# EAGLE board Clock_Updated_3_Nets (EAGLE 7.2.0)
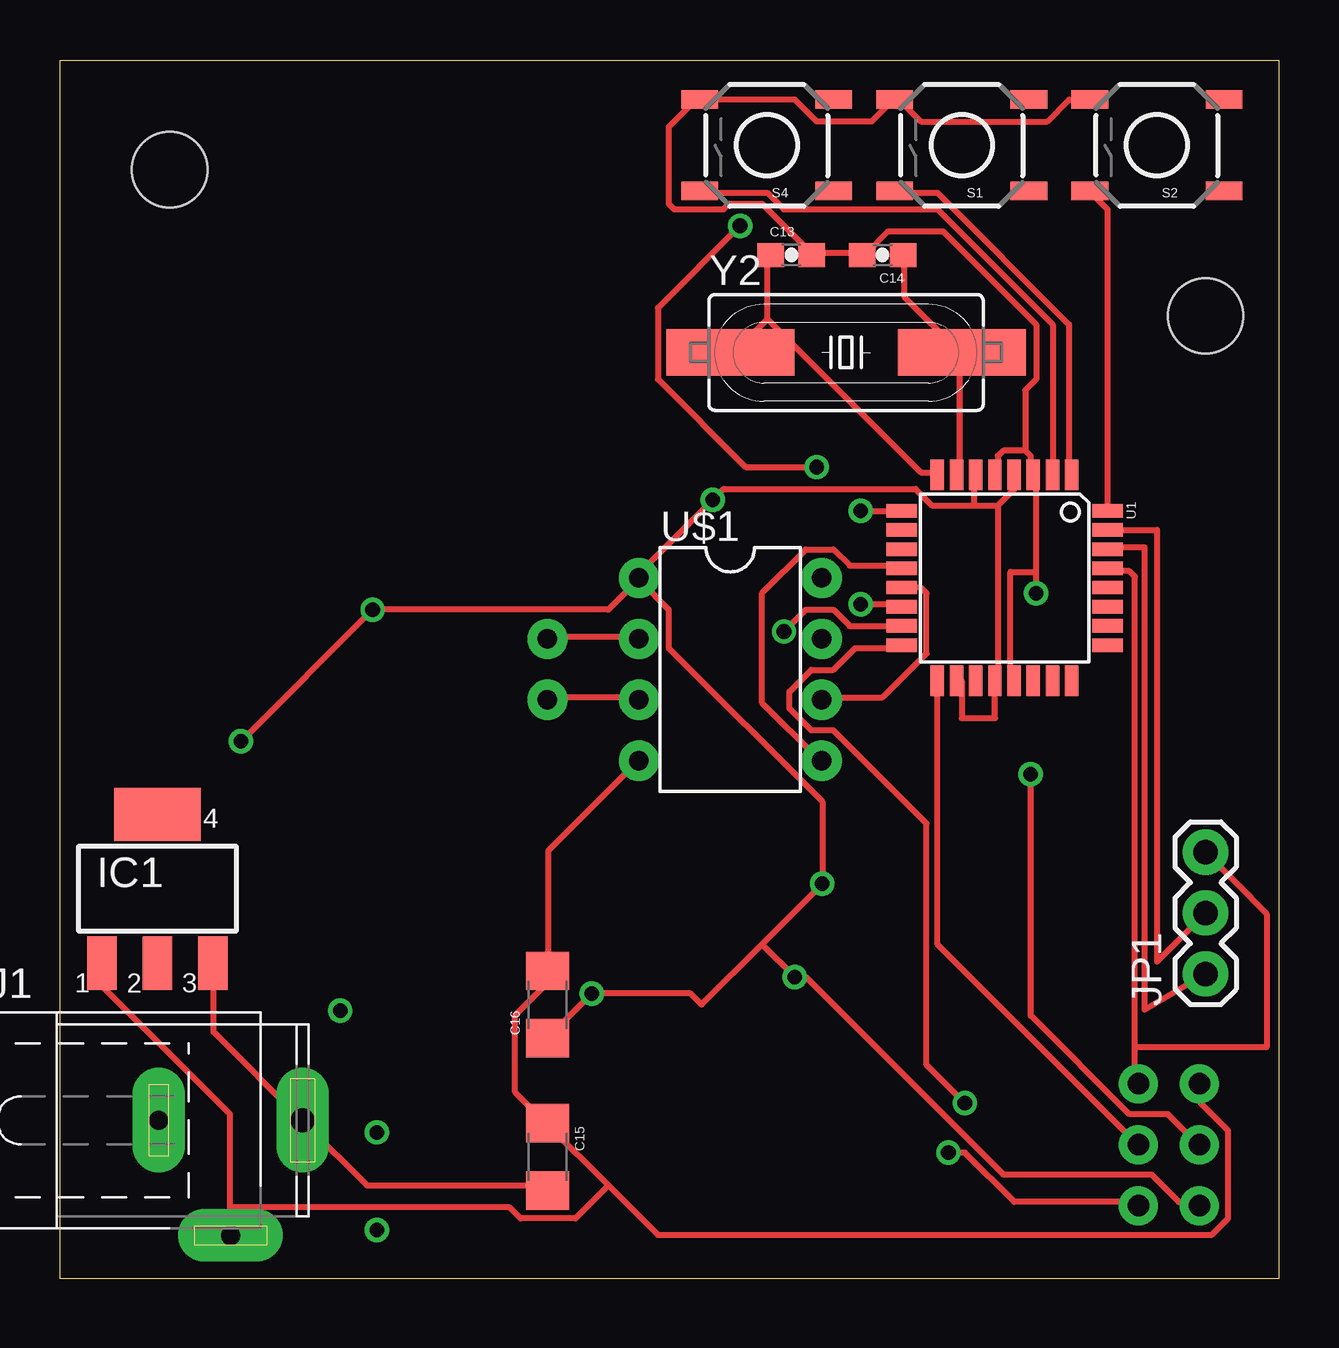
[diagram p0: board, top side]
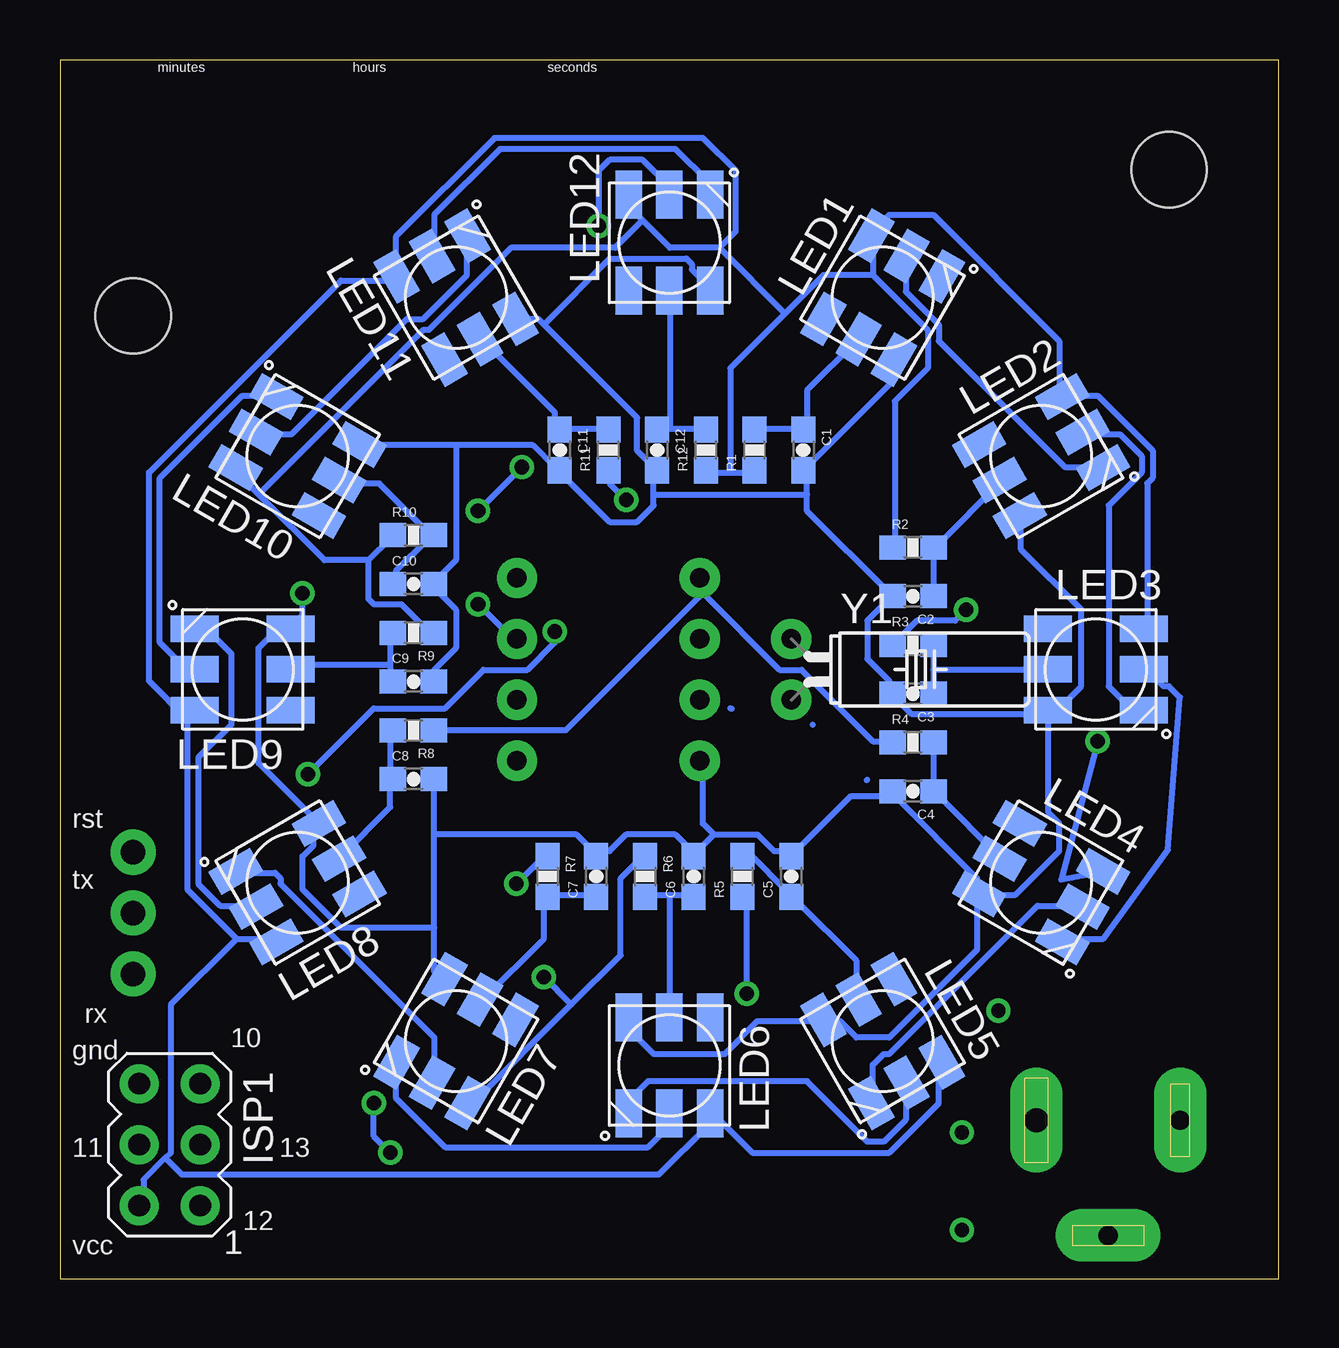
[diagram p1: board, bottom side, seen from below]

Size 50.8 x 50.8 mm. Coordinates in mm from the lower left corner, seen from the top.
Outline: 50.8,0 0,0 0,50.8 50.8,50.8 50.8,0
Copper layers (1*16): Top 0.035mm / dielectric 1.5mm / Bottom 0.035mm
Design rules "default": minimum track width 10mil, minimum drill 24mil, track to track 8mil, track to pad 8mil, pad to pad 8mil, via to via 8mil, smd to smd 8mil, copper to edge 40mil, drill to drill 8mil, minimum pad ring 10mil, minimum via ring 8mil, stop-mask expansion 4mil, vias tented up to drill 0mil, thermal gap 10mil
Holes 3.14 mm at 4.57,46.23 47.75,40.13

## Footprints (pad centres in the part's own frame; a part is rotated, then mirrored left to right if it is on the bottom)
0603-CAP = smd 1.1 x 1: 1 -0.85,0; 2 0.85,0
1206 = smd 1.6 x 1.8: 1 -1.4,0; 2 1.4,0
SOT223 = smd 1.219 x 2.235: 1 -2.311,-3.099; 2 0,-3.099; 3 2.311,-3.099 | smd 3.6 x 2.2: 4 0,3.099
AVRISP = drill 0.9 pad 1.626: 1 -1.27,2.54; 2 1.27,2.54; 3 -1.27,0; 4 1.27,0; 5 -1.27,-2.54; 6 1.27,-2.54
SPC4077 = drill 0.8 pad 2.184 long: 1 -3,0; 2 0,-4.8 | drill 1 pad 2.184 long: 3 3,0
1X03 = drill 1.016 pad 1.88: 1 0,0; 2 2.54,0; 3 5.08,0
WS2812 = smd 2 x 1.1: DI 2,0; DO 2,-1.7; LEDVDD -2,0; NC -2,1.7; VDD 2,1.7; VSS -2,-1.7
0603-RES = smd 1.1 x 1: 1 -0.85,0; 2 0.85,0
TACTILE-SWITCH-SMD = smd 1.524 x 0.762: 1 -2.794,1.905; 2 2.794,1.905; 3 -2.794,-1.905; 4 2.794,-1.905
TQFP32-08 = smd 1.27 x 0.559: 1 -4.293,2.8; 2 -4.293,2; 3 -4.293,1.2; 4 -4.293,0.4; 5 -4.293,-0.4; 6 -4.293,-1.2; 7 -4.293,-2; 8 -4.293,-2.8; 17 4.293,-2.8; 18 4.293,-2; 19 4.293,-1.2; 20 4.293,-0.4; 21 4.293,0.4; 22 4.293,1.2; 23 4.293,2; 24 4.293,2.8 | smd 0.559 x 1.27: 9 -2.8,-4.293; 10 -2,-4.293; 11 -1.2,-4.293; 12 -0.4,-4.293; 13 0.4,-4.293; 14 1.2,-4.293; 15 2,-4.293; 16 2.8,-4.293; 25 2.8,4.293; 26 2,4.293; 27 1.2,4.293; 28 0.4,4.293; 29 -0.4,4.293; 30 -1.2,4.293; 31 -2,4.293; 32 -2.8,4.293
DIL08-ROUND = drill 0.813 pad 1.676: 1 -3.81,-3.81; 2 -1.27,-3.81; 3 1.27,-3.81; 4 3.81,-3.81; 5 3.81,3.81; 6 1.27,3.81; 7 -1.27,3.81; 8 -3.81,3.81
TC38H = drill 0.813 pad 1.676: 1 -1.27,0; 2 1.27,0
HC49UP = smd 5.334 x 1.93: 1 -4.826,0; 2 4.826,0

## Placement (x,y rotation side)
C1  0.1uF  [0603-CAP]  19.81,34.54 270 bottom
C2  0.1uF  [0603-CAP]  15.24,28.45 180 bottom
C3  0.1uF  [0603-CAP]  15.24,24.38 180 bottom
C4  0.1uF  [0603-CAP]  15.24,20.32 180 bottom
C5  0.1uF  [0603-CAP]  20.32,16.76 90 bottom
C6  0.1uF  [0603-CAP]  24.38,16.76 90 bottom
C7  0.1uF  [0603-CAP]  28.45,16.76 90 bottom
C8  0.1uF  [0603-CAP]  36.07,20.83 0 bottom
C9  0.1uF  [0603-CAP]  36.07,24.89 0 bottom
C10  0.1uF  [0603-CAP]  36.07,28.96 0 bottom
C11  0.1uF  [0603-CAP]  29.97,34.54 270 bottom
C12  0.1uF  [0603-CAP]  25.91,34.54 270 bottom
C13  22pF  [0603-CAP]  30.48,42.67 0 top
C14  22pF  [0603-CAP]  34.29,42.67 180 top
C15  10uF  [1206]  20.32,5.08 270 top
C16  10uF  [1206]  20.32,11.43 90 top
IC1  317EMP  [SOT223]  4.06,16.26 0 top
ISP1  AVRISP-6  [AVRISP]  46.23,5.59 180 bottom
J1  [SPC4077]  7.11,6.6 0 top
JP1  [1X03]  47.75,12.7 90 top
LED1  WS2812  [WS2812]  16.51,40.89 60 bottom
LED2  WS2812  [WS2812]  9.91,34.29 30 bottom
LED3  WS2812  [WS2812]  7.62,25.4 0 bottom
LED4  WS2812  [WS2812]  9.91,16.51 330 bottom
LED5  WS2812  [WS2812]  16.51,9.91 300 bottom
LED6  WS2812  [WS2812]  25.4,8.89 270 bottom
LED7  WS2812  [WS2812]  34.29,9.91 240 bottom
LED8  WS2812  [WS2812]  40.89,16.51 210 bottom
LED9  WS2812  [WS2812]  43.18,25.4 180 bottom
LED10  WS2812  [WS2812]  40.89,34.29 150 bottom
LED11  WS2812  [WS2812]  34.29,40.89 120 bottom
LED12  WS2812  [WS2812]  25.4,43.18 90 bottom
R1  180  [0603-RES]  21.84,34.54 90 bottom
R2  180  [0603-RES]  15.24,30.48 0 bottom
R3  180  [0603-RES]  15.24,26.42 0 bottom
R4  180  [0603-RES]  15.24,22.35 0 bottom
R5  180  [0603-RES]  22.35,16.76 90 bottom
R6  180  [0603-RES]  26.42,16.76 270 bottom
R7  180  [0603-RES]  30.48,16.76 270 bottom
R8  180  [0603-RES]  36.07,22.86 180 bottom
R9  180  [0603-RES]  36.07,26.92 180 bottom
R10  180  [0603-RES]  36.07,30.99 0 bottom
R11  180  [0603-RES]  27.94,34.54 90 bottom
R12  180  [0603-RES]  23.88,34.54 90 bottom
S1  TAC_SWITCHSMD  [TACTILE-SWITCH-SMD]  37.59,47.24 180 top
S2  TAC_SWITCHSMD  [TACTILE-SWITCH-SMD]  45.72,47.24 180 top
S4  TAC_SWITCHSMD  [TACTILE-SWITCH-SMD]  29.46,47.24 180 top
U1  ATMEGA328P  [TQFP32-08]  39.37,29.21 270 top
U$1  DS1302  [DIL08-ROUND]  27.94,25.4 270 top
Y1  [TC38H]  20.32,25.4 270 bottom
Y2  [HC49UP]  32.77,38.61 0 top

## Library data of the parts
C1-C12 = SparkFun-Capacitors; PROD_ID: CAP-00810
C13 C14 = SparkFun-Capacitors; PROD_ID: CAP-07876
C15 C16 = SparkFun-Capacitors; PROD_ID: CAP-10057
IC1 = linear
ISP1 LED1-LED12 U$1 = adafruit
J1 = con-jack; OC_FARNELL: unknown; OC_NEWARK: unknown
JP1 = SparkFun-Connectors
R1-R12 = SparkFun-Resistors; PROD_ID: RES-08788
S1 S2 S4 = SparkFun-Electromechanical; PROD_ID: SWCH-08247
U1 = SparkFun-DigitalIC; PROD_ID: IC-09069
Y1 Y2 = SparkFun-FreqCtrl

## Nets
GND: C1.2 C2.2 C3.2 C4.2 C5.2 C6.2 C7.2 C8.2 C9.2 C10.2 C11.2 C12.2 C13.2 C14.2 C15.1 C16.2 IC1.1 ISP1.6 J1.2 LED1.VSS LED2.VSS LED3.VSS LED4.VSS LED5.VSS LED6.VSS LED7.VSS LED8.VSS LED9.VSS LED10.VSS LED11.VSS LED12.VSS S1.4 S2.4 S4.4 U1.3 U1.5 U1.21 U$1.4
N$1: ISP1.4 U1.15
N$2: ISP1.1 U1.16
N$3: JP1.1 U1.30
N$4: S2.2 U1.32
N$5: U$1.3 Y1.2
N$6: U$1.2 Y1.1
N$7: C1.1 LED1.LEDVDD R1.2
N$8: C2.1 LED2.LEDVDD R2.2
N$9: LED1.DI LED2.DO
N$10: C3.1 LED3.LEDVDD R3.2
N$11: C4.1 LED4.LEDVDD R4.2
N$12: LED3.DI LED4.DO
N$13: C5.1 LED5.LEDVDD R5.2
N$14: C6.1 LED6.LEDVDD R6.2
N$15: LED5.DI LED6.DO
N$16: C7.1 LED7.LEDVDD R7.2
N$17: C8.1 LED8.LEDVDD R8.2
N$18: LED7.DI LED8.DO
N$19: C9.1 LED9.LEDVDD R9.2
N$20: C10.1 LED10.LEDVDD R10.2
N$21: LED9.DI LED10.DO
N$22: C11.1 LED11.LEDVDD R11.2
N$23: C12.1 LED12.LEDVDD R12.2
N$24: LED11.DI LED12.DO
N$25: LED4.DI LED5.DO
N$26: LED8.DI LED9.DO
N$27: JP1.2 U1.31
N$30: S1.2 U1.1
N$31: U1.13 U$1.6
N$32: U1.12 U$1.5
N$33: U1.14 U$1.7
N$34: ISP1.3 U1.17
N$36: ISP1.5 JP1.3 U1.29
N$37: S4.2 U1.2
N$38: C13.1 U1.8 Y2.1
N$40: LED2.DI LED3.DO
N$41: LED6.DI LED7.DO
N$42: LED10.DI LED11.DO
N$43: LED12.DI U1.9
N$44: C14.1 U1.7 Y2.2
N$45: C15.2 IC1.3 J1.3
VBAT: U$1.8
VCC: C16.1 ISP1.2 LED1.VDD LED2.VDD LED3.VDD LED4.VDD LED5.VDD LED6.VDD LED7.VDD LED8.VDD LED9.VDD LED10.VDD LED11.VDD LED12.VDD R1.1 R2.1 R3.1 R4.1 R5.1 R6.1 R7.1 R8.1 R9.1 R10.1 R11.1 R12.1 U1.4 U1.6 U1.18 U1.20 U$1.1

## Tracks (layer width: path | path; a pad name or v marks a point on that pad's centre or on a via)
GND  (via drill 0.61)
  Top 0.254: 40.23,34.52 39.32,34.52 39.09,34.29 39.09,33.6 U1.5 | 40.23,34.52 40.46,34.29 40.46,33.6 U1.3 40.69,33.38 40.69,29.46 | S2.4 42.06,49.15 41.15,48.23 35.89,48.23 34.98,49.15 S1.4 34.75,49.15 33.83,48.23 31.55,48.23 30.63,49.15 S4.4 26.52,49.15 25.38,48.01 25.38,44.81 25.6,44.58 27.66,44.58 27.89,44.81 29.26,44.81 31.32,42.75 C13.2 31.55,42.75 33.38,42.75 C14.2 33.6,42.75 34.52,43.66 36.8,43.66 40.69,39.78 40.69,37.49 40.23,37.03 40.23,34.52 | v40.69,28.57 40.69,29.46 | U$1.4 24,21.49 20.34,17.83 20.34,13.03 C16.2 20.12,12.8 20.12,12.12 18.97,10.97 18.97,7.77 20.12,6.63 C15.1 20.34,6.4 22.86,3.89 | U1.21 39.62,24.92 39.62,29.46 40.69,29.46 | 7.09,2.97 7.09,1.83 J1.2 | 7.09,2.97 7.09,6.86 1.83,12.12 1.83,13.03 IC1.1 | 22.86,3.89 24.92,1.83 48.01,1.83 48.69,2.52 48.69,6.17 47.55,7.32 47.55,8 ISP1.6 | 7.09,2.97 18.75,2.97 19.2,2.52 21.49,2.52 22.86,3.89
  Bottom 0.254: LED1.VSS 16.23,38.18 16.23,37.26 19.66,33.83 C1.2 19.66,33.6 19.66,32.69 | LED3.VSS 9.83,23.55 15.32,23.55 16,24.23 C3.2 16.23,24.46 16.23,24.92 17.14,25.83 17.14,27.43 16.23,28.35 C2.2 16.23,28.57 19.66,32 19.66,32.69 | LED2.VSS 10.74,31.77 10.74,30.4 8.23,27.89 8.23,24.69 9.14,23.77 9.6,23.77 LED3.VSS | C9.2 35.2,24.92 35.2,25.38 34.29,26.29 34.29,27.89 35.2,28.8 C10.2 35.2,29.03 34.29,29.95 34.29,34.75 | 26.06,32.69 26.06,32.23 26.75,31.55 27.89,31.55 29.95,33.6 C11.2 30.18,33.83 31.09,34.75 34.29,34.75 | 26.06,32.69 26.06,33.6 C12.2 26.06,33.83 26.75,34.52 26.75,35.89 30.63,39.78 | 34.29,34.75 38.18,34.75 LED10.VSS | 30.63,39.78 30.86,40.01 31.77,40.01 LED11.VSS | 30.63,39.78 27.89,42.52 24.69,42.52 24.46,42.29 24.46,42.06 23.77,41.38 LED12.VSS | 26.06,32.69 19.66,32.69 | 35.2,14.63 35.2,12.8 34.98,12.57 LED7.VSS | 35.2,14.63 35.2,18.52 | 35.2,18.52 35.2,20.8 C8.2 | 35.2,14.63 39.09,14.63 40.69,16.23 40.69,17.6 40.23,18.06 40.23,18.97 LED8.VSS 40.23,19.2 42.52,21.49 42.52,26.29 41.83,26.98 41.38,26.98 LED9.VSS 41.15,27.2 40.69,27.66 v40.69,28.57 | LED6.VSS 26.98,10.74 26.98,10.29 26.06,9.37 23.09,9.37 21.72,10.74 19.2,10.74 LED5.VSS 18.97,10.74 18.29,10.74 17.6,10.06 16.23,10.06 12.57,13.72 12.57,16 LED4.VSS | 23.55,18.52 21.72,18.52 21.03,17.83 20.34,17.83 C5.2 20.12,17.83 17.83,20.12 16.23,20.12 C4.2 16,20.12 12.57,16.69 12.57,16.23 LED4.VSS | 23.55,18.52 24.23,17.83 C6.2 24.46,17.83 25.15,18.52 27.2,18.52 27.89,17.83 28.35,17.83 C7.2 28.57,17.83 29.26,18.52 35.2,18.52 | 23.55,18.52 24,18.97 24,21.49 U$1.4 | LED3.VSS 9.6,23.55 9.6,19.43 9.14,18.97 9.14,17.83 10.97,16 12.34,16 LED4.VSS
N$1  (via drill 0.61)
  Top 0.254: v30.18,26.98 31.09,27.89 32.23,27.89 32.92,27.2 34.98,27.2 U1.15 | v40.46,21.03 40.46,10.97 44.58,6.86 46.18,6.86 47.32,5.71 ISP1.4
  Bottom 0.254: v30.18,26.98 30.18,26.52 31.32,25.38 33.15,25.38 34.75,23.77 37.72,23.77 v40.46,21.03
N$2  (via drill 0.61)
  Top 0.254: v37.72,7.32 36.12,8.91 36.12,18.97 32.23,22.86 31.32,22.86 30.4,23.77 30.4,24.46 31.32,25.38 32.23,25.38 33.15,26.29 34.98,26.29 U1.16 | v37.03,5.26 37.72,5.26 39.78,3.2 44.81,3.2 ISP1.1
  Bottom 0.254: v37.72,7.32 37.72,5.94 v37.03,5.26
N$3
  Top 0.254: JP1.1 45.21,11.21 45.21,30.48 43.66,30.48 U1.30
N$4
  Top 0.254: U1.32 43.66,44.58 42.98,45.26 S2.2
N$5
  Top 0.254: Y1.2 20.34,24.23 24,24.23 U$1.3
N$6
  Top 0.254: Y1.1 20.34,26.75 24,26.75 U$1.2
N$7
  Bottom 0.254: R1.2 21.72,35.43 19.89,35.43 C1.1 19.66,35.43 19.66,37.03 17.6,39.09 LED1.LEDVDD
N$8
  Bottom 0.254: C2.1 14.4,28.57 14.4,30.4 R2.2 14.17,30.63 11.66,33.15 LED2.LEDVDD
N$9
  Bottom 0.254: LED2.DO 7.54,33.83 8.91,33.83 14.17,39.09 14.17,39.78 15.54,41.15 15.54,42.52 LED1.DI
N$10
  Bottom 0.254: 14.4,25.38 14.4,26.29 R3.2 | 14.4,25.38 14.4,24.46 C3.1 | 14.4,25.38 9.83,25.38 LED3.LEDVDD
N$11
  Bottom 0.254: R4.2 14.4,22.17 14.4,20.34 C4.1 14.17,20.12 11.66,17.6 LED4.LEDVDD
N$12
  Bottom 0.254: LED3.DI 5.49,25.38 4.8,24.69 4.57,24.69 4.12,24.23 4.62,17.88 7.32,14.17 8.91,14.17 LED4.DO
N$13
  Bottom 0.254: R5.2 22.17,17.83 20.34,16 C5.1 20.12,15.77 17.6,13.26 17.6,11.66 LED5.LEDVDD
N$14
  Bottom 0.254: 25.38,16 26.29,16 R6.2 | 25.38,16 24.46,16 C6.1 | 25.38,16 25.38,10.97 LED6.LEDVDD
N$15
  Bottom 0.254: LED6.DO 26.98,7.09 26.98,7.54 26.29,8.23 19.66,8.23 17.14,5.71 16.46,5.71 15.54,6.63 15.54,8 LED5.DI
N$16
  Bottom 0.254: C7.1 28.57,16 30.4,16 R7.2 30.63,15.77 30.63,14.17 33.15,11.66 LED7.LEDVDD
N$17
  Bottom 0.254: R8.2 37.03,22.86 37.03,21.03 C8.1 37.03,20.8 37.03,19.66 39.09,17.6 LED8.LEDVDD
N$18
  Bottom 0.254: LED7.DI 35.2,8.23 35.2,10.06 41.6,16.46 41.6,16.69 41.83,16.92 43.43,16.92 LED8.DO
N$19
  Bottom 0.254: 37.03,25.6 37.03,26.75 R9.2 | 37.03,25.6 37.03,24.92 C9.1 | 37.03,25.6 41.15,25.6 LED9.LEDVDD
N$20
  Bottom 0.254: C10.1 36.8,29.03 36.8,29.49 35.43,30.86 R10.2 35.43,31.09 37.49,33.15 39.09,33.15 LED10.LEDVDD
N$21
  Bottom 0.254: LED10.DO 41.83,36.8 43.2,36.8 46.63,33.38 46.63,26.52 45.72,25.6 45.26,25.6 LED9.DI
N$22
  Bottom 0.254: R11.2 28.12,35.43 29.95,35.43 C11.1 30.18,35.43 30.18,36.12 33.15,39.09 LED11.LEDVDD
N$23
  Bottom 0.254: 25.38,35.43 25.83,35.43 C12.1 | 25.38,35.43 24,35.43 R12.2 | 25.38,35.43 25.38,41.15 LED12.LEDVDD
N$24
  Bottom 0.254: LED11.DI 35.2,42.75 35.2,44.35 32.46,47.09 25.15,47.09 23.77,45.72 23.77,45.26 LED12.DO
N$25
  Bottom 0.254: LED5.DO 16.92,7.54 16.92,8.91 16.46,9.37 16.23,9.37 10.06,15.54 8.23,15.54 LED4.DI
N$26
  Bottom 0.254: LED8.DI 42.75,15.54 44.12,15.54 45.03,16.46 45.03,21.72 43.66,23.09 43.66,26.06 44.58,26.98 45.03,26.98 LED9.DO
N$27
  Top 0.254: U1.31 45.72,31.21 45.72,13.21 JP1.2
N$28
  Bottom 0.254: 22.86,23.77 22.8,23.75 | 17.14,20.8 17.17,20.78 | 19.43,23.09 19.43,23.08
N$29  (via drill 0.6)
  other vias: 13.21,2.03
N$30
  Top 0.254: U1.1 42.06,33.6 42.06,39.78 36.58,45.26 34.98,45.26 S1.2
N$31
  Top 0.254: U1.13 35.2,28.8 35.89,28.8 36.12,28.57 36.12,26.06 34.29,24.23 31.77,24.23 U$1.6
N$32
  Top 0.254: U1.12 34.98,29.72 32.92,29.72 32.23,30.4 31.09,30.4 29.26,28.57 29.26,24 31.55,21.72 U$1.5
N$33  (via drill 0.61)
  Top 0.254: v33.38,28.12 34.98,28.12 U1.14
  Bottom 0.254: v33.38,28.12 31.77,26.52 U$1.7
N$34
  Top 0.254: U1.17 36.58,13.95 44.81,5.71 ISP1.3
N$35  (via drill 0.6)
  other vias: 13.21,6.1
N$36
  Top 0.254: 44.81,9.65 44.81,8.23 ISP1.5 | 44.81,9.65 44.81,29.26 44.58,29.49 43.66,29.49 U1.29 | JP1.3 50.29,15.21 50.29,9.65 44.81,9.65
N$37
  Top 0.254: U1.2 41.38,33.6 41.38,39.78 36.58,44.58 30.18,44.58 29.49,45.26 26.75,45.26 S4.2
N$38
  Top 0.254: 29.49,40.01 29.49,42.52 C13.1 | 29.49,40.01 28.12,38.63 Y2.1 | 29.49,40.01 35.89,33.6 36.35,33.6 U1.8
N$39  (via drill 0.6)
  other vias: 11.68,11.18
N$40
  Bottom 0.254: LED3.DO 5.71,23.77 6.17,23.77 7.09,24.69 7.09,32.23 5.71,33.6 5.71,34.29 6.63,35.2 8,35.2 LED2.DI
N$41
  Bottom 0.254: LED6.DI 25.6,6.86 25.6,6.17 26.29,5.49 34.75,5.49 36.8,7.54 36.8,8.91 LED7.DO
N$42
  Bottom 0.254: LED11.DO 33.83,43.43 33.83,41.83 35.66,40.01 36.35,40.01 41.15,35.2 42.52,35.2 LED10.DI
N$43  (via drill 0.61)
  Top 0.254: v33.38,32 34.98,32 U1.9 | v31.55,33.83 28.57,33.83 24.92,37.49 24.92,40.46 v28.35,43.89
  Bottom 0.254: v31.55,33.83 v33.38,32 | v28.35,43.89 28.35,46.18 27.89,46.63 26.52,46.63 25.6,45.72 25.6,45.26 LED12.DI
N$44
  Top 0.254: C14.1 35.2,42.52 35.2,40.92 37.49,38.63 Y2.2 37.49,38.41 37.49,33.6 U1.7
N$45
  Top 0.254: C15.2 20.12,3.89 12.8,3.89 10.29,6.4 J1.3 10.06,6.63 6.4,10.29 6.4,13.03 IC1.3
VCC  (via drill 0.61)
  Top 0.254: C16.1 20.34,10.06 v22.17,11.89 26.29,11.89 26.75,11.43 29.26,13.95 | 29.26,13.95 v31.77,16.46 31.77,19.89 25.38,26.29 25.38,27.89 24.23,29.03 U$1.1 | 29.26,13.95 v30.63,12.57 31.09,12.57 39.32,4.34 45.49,4.34 46.63,3.2 47.32,3.2 ISP1.2 | 39.09,32.23 39.09,24.92 U1.20 38.97,23.37 37.59,23.37 37.59,24.92 U1.18 | 39.09,32.23 39.78,32.92 39.78,33.38 U1.4 | U$1.1 24,29.03 22.86,27.89 v13.03,27.89 v7.54,22.4 | U$1.1 24,29.26 v27.2,32.46 27.66,32.92 35.66,32.92 36.35,32.23 38.1,32.23 | 38.1,32.23 39.09,32.23 | U1.6 38.1,33.5 38.1,32.23
  Bottom 0.254: 37.95,29.95 37.95,28.35 37.72,28.12 36.58,28.12 35.43,26.98 R9.1 | 37.95,29.95 37.03,30.86 R10.1 | 42.52,32.69 39.78,29.95 37.95,29.95 | 42.52,32.69 43.43,33.6 LED10.VDD | LED3.VDD 5.49,27.2 5.49,33.15 5.26,33.38 5.26,34.52 7.54,36.8 8.91,36.8 LED2.VDD 9.14,36.8 9.14,39.09 14.4,44.35 16.23,44.35 16.92,43.66 LED1.VDD 16.92,43.43 16.92,41.83 | 22.86,33.6 23.77,33.6 R12.1 | 22.86,33.6 21.95,33.6 R1.1 | 16.92,41.83 14.63,39.55 14.63,37.95 16,36.58 16,30.63 R2.1 | 22.86,33.6 22.86,37.95 20.57,40.23 | 20.57,40.23 18.97,41.83 16.92,41.83 | 26.52,44.12 25.38,42.98 23.32,42.98 | 26.52,44.12 26.98,44.58 26.98,45.03 LED12.VDD | 20.57,40.23 23.32,42.98 | 23.32,42.98 22.63,43.66 22.63,46.18 24,47.55 32.69,47.55 36.8,43.43 36.8,41.83 LED11.VDD 36.8,41.6 39.09,41.6 47.09,33.6 47.09,24.92 45.49,23.32 | 42.52,32.69 35.66,39.55 35.43,39.55 32,42.98 27.66,42.98 26.52,44.12 | LED5.VDD 14.17,8.91 14.17,7.32 16.23,5.26 21.95,5.26 23.55,6.86 LED6.VDD 23.77,6.86 23.77,6.4 25.83,4.34 45.72,4.34 46.41,5.03 | 43.43,14.17 41.83,14.17 LED8.VDD | 43.43,14.17 45.49,16.23 45.49,23.32 | 45.49,23.32 45.26,23.55 LED9.VDD 45.49,23.32 | 46.41,5.03 46.18,5.26 46.18,11.43 43.43,14.17 | 46.41,5.03 47.32,4.12 47.32,3.2 ISP1.2 | 29.49,11.43 33.6,7.32 LED7.VDD | 29.49,11.43 27.43,13.49 27.43,16.69 26.52,17.6 R6.1 | v22.17,11.89 22.17,15.77 R5.1 | v31.77,16.46 30.63,17.6 R7.1 | v30.63,12.57 29.49,11.43 | 24,28.57 20.8,25.38 19.89,25.38 16.92,22.4 16.23,22.4 R4.1 | 24,28.57 24,29.03 U$1.1 24,28.57 | v13.03,27.89 13.49,27.43 15.09,27.43 16,26.52 R3.1 | R8.1 29.72,22.86 24,28.57 | v27.2,32.46 27.89,33.15 27.89,33.6 R11.1
  Bottom 0.254: v7.54,22.4 9.07,16.64 LED4.VDD

## Text on the board
bPlace: seconds | hours | minutes
bNames: rst | tx | rx | 10 | gnd | 13 | 11 | 12 | vcc